# Allegro board Sense8.brd
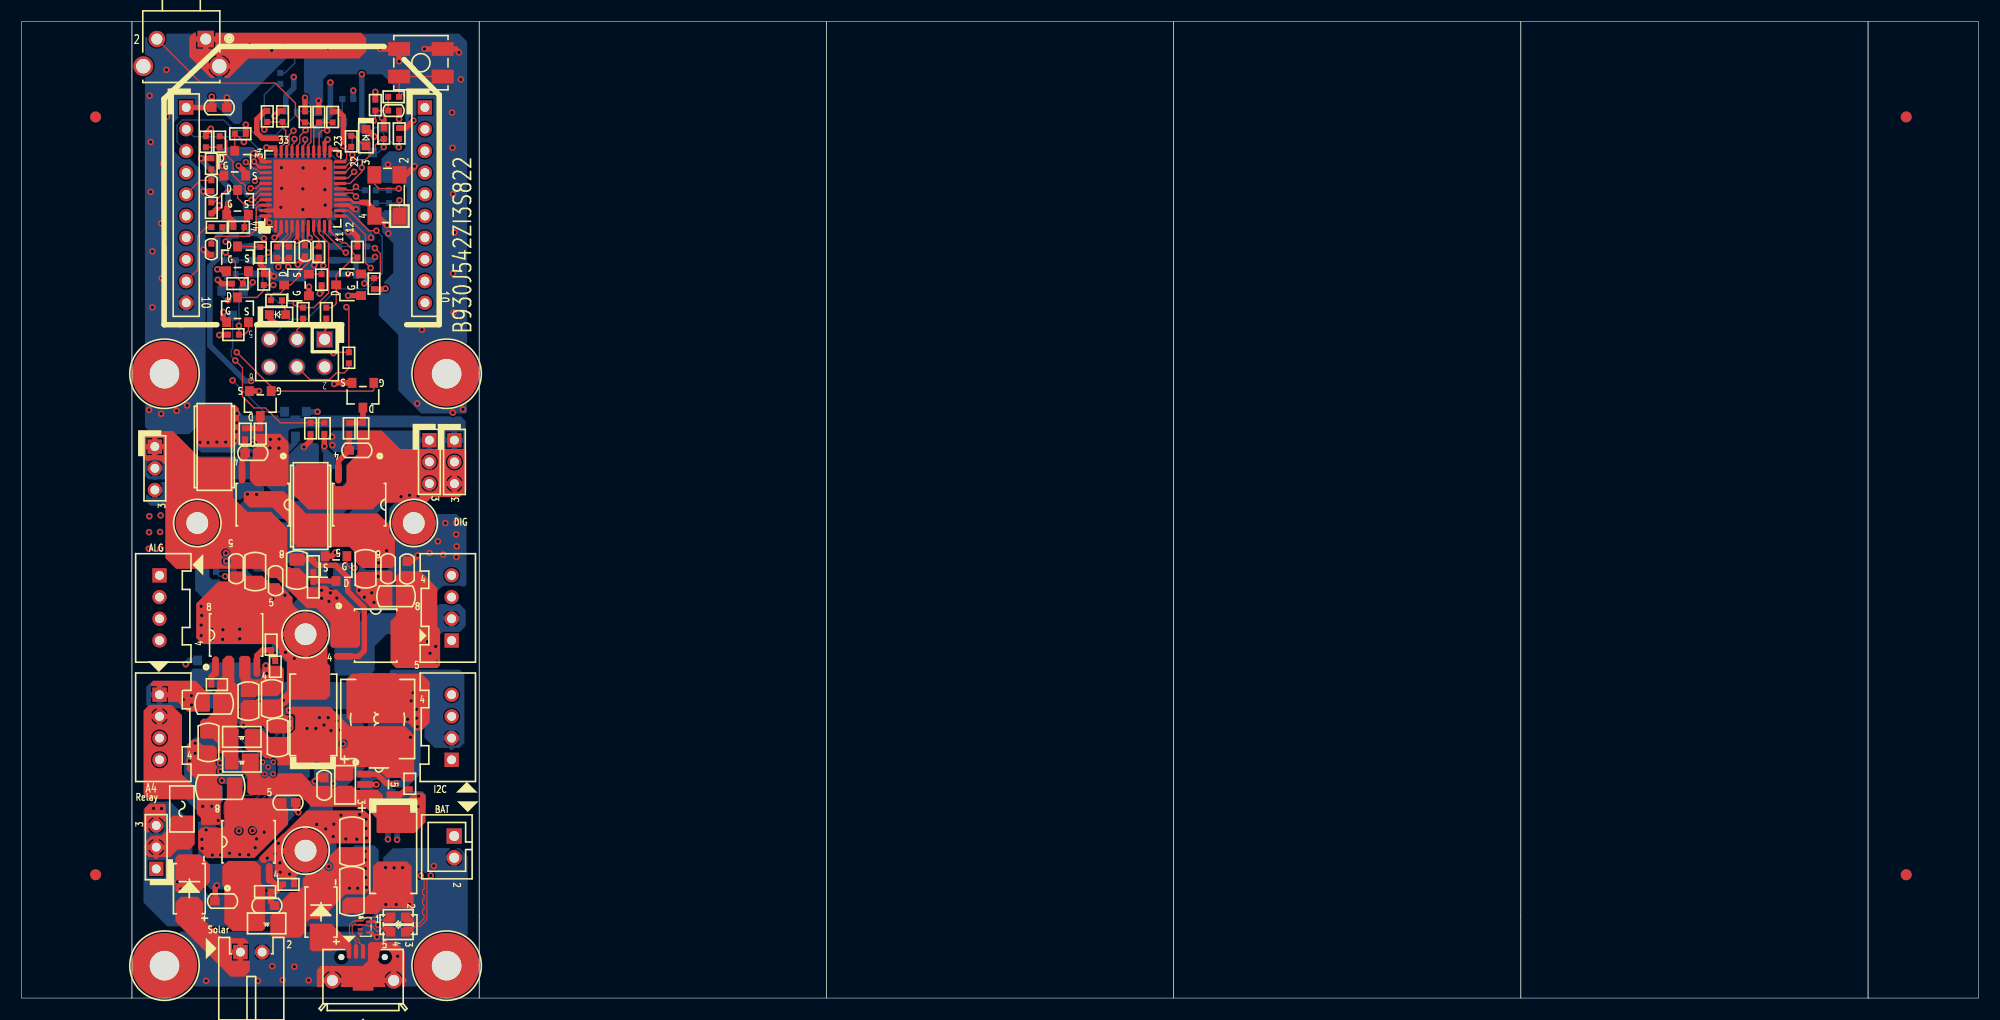
[diagram p0: board, top side]
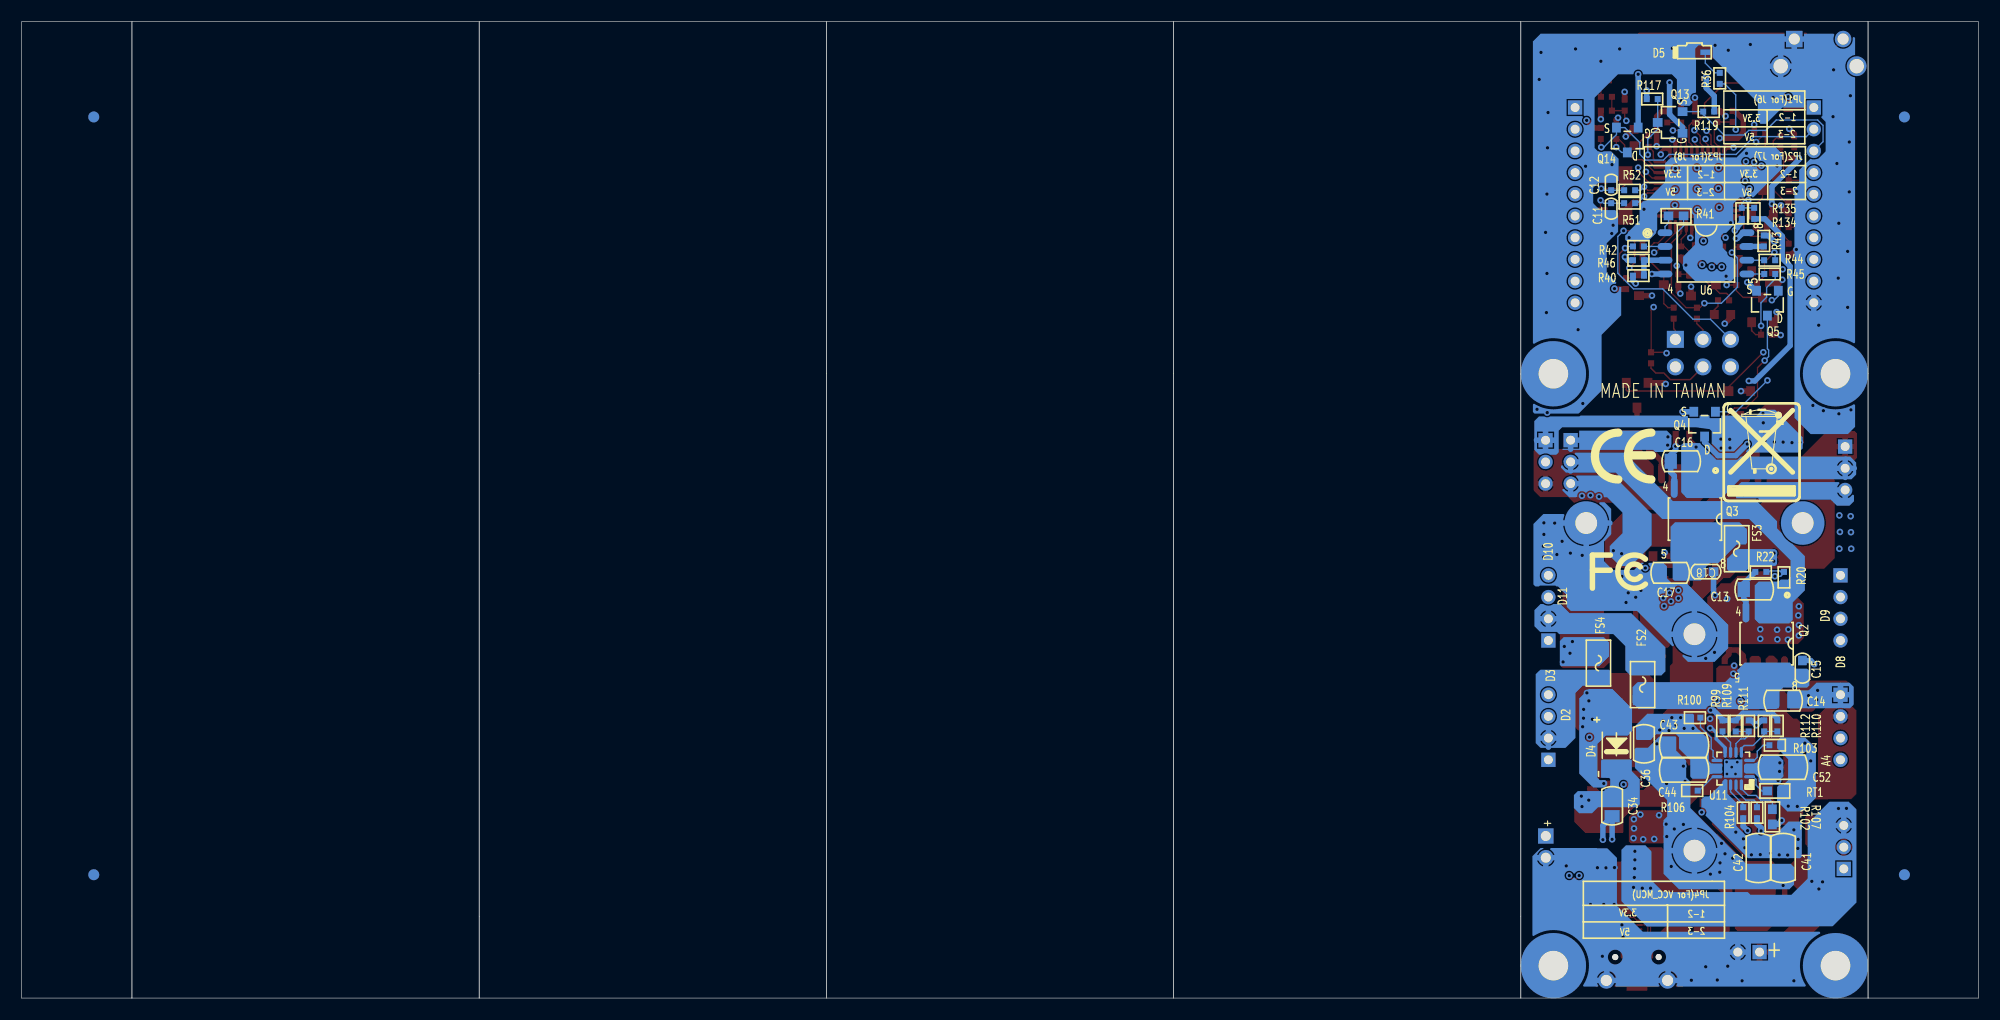
[diagram p1: board, bottom side, seen from below]

Outline 180.32 x 90 mm; copper layers: TOP, L2-GND1, L3-INT, L4-VCC, L5-GND2, BOTTOM. Coordinates in mm from the lower left corner of the outline.
Outline path: 10.16,90 0,90 0,0 10.16,0 ; 10.16,90 10.16,0 ; 10.16,90 42.16,90 ; 10.16,90 10.16,57.56 10.16,7.56 10.16,0 ; 10.16,0 42.16,0 ; 42.16,90 42.16,57.56 ; 42.16,90 74.16,90 ; 42.16,90 42.16,57.56 ; 42.16,57.56 42.16,7.56 ; 42.16,57.56 42.16,7.56 ; 74.16,90 74.16,57.56 ; 74.16,90 106.16,90 ; 74.16,90 74.16,57.56 ; 42.16,7.56 42.16,0 ; 42.16,7.56 42.16,0 ; 42.16,0 74.16,0 ; 74.16,57.56 74.16,7.56 ; 74.16,57.56 74.16,7.56 ; 106.16,90 106.16,57.56 ; 106.16,90 138.16,90 ; 106.16,90 106.16,57.56 ; 74.16,7.56 74.16,0 ; 74.16,7.56 74.16,0 ; 74.16,0 106.16,0 ; 106.16,57.56 106.16,7.56 ; 106.16,57.56 106.16,7.56 ; 138.16,90 138.16,0 ; 138.16,90 170.16,90 ; 138.16,90 138.16,57.56 138.16,7.56 138.16,0 ; 106.16,7.56 106.16,0 ; 106.16,7.56 106.16,0 ; 106.16,0 138.16,0 ; 170.16,90 170.16,0 ; 170.16,90 180.32,90 180.32,0 170.16,0 ; 170.16,90 170.16,0 ; 138.16,0 170.16,0

## Design rules (mm)
net group DIFFPAIR1: nets USB_R_D+ USB_R_D-
net group PW: nets +V5A INT_5V LX N15488481 N15503313 USB5V USB_5V VCC3_3 VCC3_3_ALG1 VCC3_3_DIG1 VCC3_3_I2C VCC_BAT W40_VCC_BAT

## Placement (name value [footprint] x y rotation side)
C1  0.1UF/50V/X7R/6  [C0603]  23.4 38.46 90 top
C2  0.1UF/50V/X7R/6  [C0603]  18.5 8.94 0 top
C3  1U/16V/X7R/6  [C0603]  22.61 8.53 180 top
C4  0.1UF/50V/X7R/6  [C0603]  24.55 18.02 180 top
C5  22u/10V/X7R/1206  [C1206]  18.3 19.44 0 top
C6  0.1U/16V/X7R/4  [C0402]  17.48 74.87 90 top
C9  0.1U/16V/X7R/4  [C0402]  17.48 69.03 90 top
C10  1U/6.3V/X5R/4  [C0402]  26.11 68.88 90 top
C11  22P/50V/NPO/4  [C0402]  33.84 72.76 90 bottom
C12  22P/50V/NPO/4  [C0402]  33.84 74.97 270 bottom
C13  10u/16V/X7R/8  [C0805]  20.65 37.66 180 bottom
C14  10u/16V/X7R/8  [C0805]  17.99 27.41 0 bottom
C15  0.1UF/50V/X7R/6  [C0603]  16.21 30.42 270 bottom
C16  10u/16V/X7R/8  [C0805]  27.38 49.48 180 bottom
C17  10u/16V/X7R/8  [C0805]  28.4 39.2 180 bottom
C18  0.1UF/50V/X7R/6  [C0603]  25.1 39.31 0 bottom
C25  1U/16V/X7R/6  [C0603]  27.88 19.63 270 top
C26  0.1U/50V/X7R/8  [C0805]  17.73 27.13 0 top
C27  10u/16V/X7R/8  [C0805]  17.21 23.56 90 top
C28  0.1U/50V/X7R/8  [C0805]  20.89 27.37 90 top
C29  10u/16V/X7R/8  [C0805]  23.05 27.58 90 top
C30  10u/16V/X7R/8  [C0805]  25.36 39.46 270 top
C31  10u/16V/X7R/8  [C0805]  34.5 37.04 0 top
C32  0.1UF/50V/X7R/6  [C0603]  35.51 39.57 270 top
C33  10U/6.3V/X5R/6  [C0603]  18.21 82.09 180 top
C34  22U/10V/X5R/8  [C0805]  33.75 17.72 90 bottom
C35  0.1U/50V/X7R/8  [C0805]  23.59 24.02 270 top
C36  22U/10V/X5R/8  [C0805]  30.81 23.44 90 bottom
C37  0.1UF/250V/X7R/1206  [C1206H75]  30.43 9.85 90 top
C38  0.1U/16V/X7R/4/X  [C0402]  34.28 81.8 180 top
C41  0.1U/100V/X7R/1206  [C1206]  17.99 12.91 90 bottom
C42  10u/25V/X7R/1206  [C1206]  20.27 12.91 90 bottom
C43  0.1U/100V/X7R/1206  [C1206]  27.12 23.31 180 bottom
C44  10u/25V/X7R/1206  [C1206]  27.12 21.02 180 bottom
C45  10u/25V/X7R/1206  [C1206]  30.43 14.43 270 top
C46  1U/16V/X7R/6  [C0603]  30.88 50.49 0 top
C47  10u/16V/X7R/8  [C0805]  31.69 39.56 90 top
C48  0.1UF/50V/X7R/6  [C0603]  33.76 39.57 90 top
C49  1U/16V/X7R/6  [C0603]  21.29 50.23 0 top
C50  10u/16V/X7R/8  [C0805]  21.53 39.31 90 top
C51  0.1UF/50V/X7R/6  [C0603]  19.76 39.56 90 top
C52  4.7U/16V/X7R/1206  [C1206]  18 21.28 0 bottom
D2  BL-HY036D-AV-TRB  [LED0603]  31.73 79.32 90 top
D3  BL-HB336A-AV-TRB  [LED0603]  23.57 63.01 180 top
D4  SL34-AL/SMA-L  [SMA-L]  33.35 23.31 270 bottom
D5  12-215/R6C-AR1S1B/3C  [LED12-215]  26.16 87.19 180 bottom
D6  D-B340A-13F  [SMA]  27.59 7.94 90 top
D7  D-B340A-13F  [SMA]  15.45 10.1 90 top
D8  RCLAMP3324T/SLP1710P4T-6L  [SLP1710P4T]  31.7 6.54 270 top
EC2  330U/6.3V  [C7343H18]  34.24 13.4 270 top
EC3  330U/6.3V  [C7343H18]  26.88 26.1 90 top
FB1  120Z/3A/0805  [L0805H36]  22.57 6.88 0 top
FB2  120Z/3A/0805/X  [L0805H36]  20.29 21.79 0 top
FB3  120Z/3A/0805  [L0805H36]  20.29 24.08 0 top
FS1  3A/32V/1206  [SF1206H53]  14.76 17.43 270 top
FS2  3A/32V/1206  [SF1206H53]  30.94 28.9 270 bottom
FS3  3A/32V/1206  [SF1206H53]  22.27 41.42 90 bottom
FS4  3A/32V/1206  [SF1206H53]  35.01 30.87 90 bottom
H1  MountingHole/no guard hole  [2_7MMHR6MM-PT]  39.16 57.55 0 top
H2  MountingHole/no guard hole  [2_7MMHR6MM-PT]  13.16 2.99 0 top
H3  MountingHole/no guard hole  [2_7MMHR6MM-PT]  13.16 57.55 0 top
H4  MountingHole/no guard hole  [2_7MMHR6MM-PT]  39.16 2.99 0 top
H5  MountingHole/no guard hole  [DCX1-C158D79]  26.16 13.59 0 top
H6  MountingHole/no guard hole  [DCX1-C158D79]  26.16 33.54 0 top
H7  MountingHole/no guard hole  [DCX1-C158D79]  16.18 43.79 0 top
H8  MountingHole/no guard hole  [DCX1-C158D79]  36.14 43.79 0 top
J1  Micro USB B Type  [MICROUSB_B]  31.46 1.63 0 top
J2  HEADER10/2mm  [D1A10-2MM-FEMALE]  15.16 82.09 270 top
J3  HEADER10/2mm  [D1A10-2MM-FEMALE]  37.16 82.09 270 top
J4  Wafer 4Px1/2.0mm  [4W-D1A4-2MM-TB-12005W00]  39.62 21.96 270 top
J6  Wafer 4Px1/2.0mm  [4W-D1A4-2MM-TB-12005W00]  39.62 32.96 270 top
J7  Wafer 4Px1/2.0mm  [4W-D1A4-2MM-TB-12005W00]  12.7 38.96 90 top
J8  Wafer 4Px1/2.0mm  [4W-D1A4-2MM-TB-12005W00]  12.7 27.96 90 top
J9  Wafer2P/2.0mm/90D  [EVER-2022-02]  20.16 4.24 180 top
J10  Wafer2P/2.0mm  [DFAN2-2MM]  39.86 14.94 270 top
J11  Header3Px2/2.54mm/X  [D2A3N]  27.92 60.72 180 top
JP1  PH3Px1/2mm  [D1A3-2MM]  37.57 51.43 270 top
JP2  PH3Px1/2mm  [D1A3-2MM]  12.27 50.84 270 top
JP3  PH3Px1/2mm  [D1A3-2MM]  12.4 11.91 90 top
JP4  PH3Px1/2mm  [D1A3-2MM]  39.88 51.42 270 top
L1  10uH/4A/X  [L-S7_3X6_8H3]  32.81 25.72 90 top
L2  22uH/2A  [L-S5X5H4]  32.79 25.72 90 top
L3  DLW21HN900SQ2  [L2012-4P]  34.72 6.77 270 top
NOREF  -  [unnamed]  6.81 81.22 0 top
NOREF#2  -  [unnamed]  6.81 11.37 0 top
NOREF#3  -  [#2]  10.75 -44.26 0 top
NOREF#4  -  [unnamed]  173.68 81.22 0 top
NOREF#5  -  [unnamed]  173.68 11.37 0 top
NOREF#6  -  [unnamed]  173.68 11.37 180 bottom
NOREF#7  -  [#2]  35.66 47.49 180 bottom
NOREF#8  -  [unnamed]  6.81 11.37 180 bottom
NOREF#9  -  [#2]  40.41 82.85 270 bottom
NOREF#10  -  [unnamed]  6.81 81.22 180 bottom
NOREF#11  -  [unnamed]  173.68 81.22 180 bottom
NOREF#12  -  [#2]  19.97 51.32 180 bottom
NOREF#13  -  [#2]  34.29 39.31 180 bottom
Q1  FDS4685/SOIC-8  [SOP8]  20.91 14.41 0 top
Q2  FDS4685/SOIC-8  [SOP8]  19.51 32.67 0 bottom
Q3  FDS4685/SOIC-8  [SOP8]  26.11 44.15 0 bottom
Q4  2N7002/SOT-23  [SOT23-GDS]  25.22 52.9 0 bottom
Q5  2N7002/SOT-23  [SOT23-GDS]  19.43 64.05 0 bottom
Q6  FDS4685/SOIC-8  [SOP8]  32.63 33.41 270 top
Q7  2N7002/SOT-23  [SOT23-GDS]  28.97 39.59 180 top
Q8  2N7002/SOT-23  [SOT23-GDS]  19.64 76.95 0 top
Q9  2N7002/SOT-23  [SOT23-GDS]  25.33 65.73 90 top
Q10  2N7002/SOT-23  [SOT23-GDS]  19.89 68.14 0 top
Q11  2N7002/SOT-23  [SOT23-GDS]  30.13 65.75 90 top
Q12  2N7002/SOT-23  [SOT23-GDS]  19.89 63.44 0 top
Q13  2N7002/SOT-23  [SOT23-GDS]  28.4 80.71 90 bottom
Q14  2N7002/SOT-23  [SOT23-GDS]  32.35 79.09 0 bottom
Q15  2N7002/SOT-23  [SOT23-GDS]  19.89 73.35 0 top
Q16  FDS4685/SOIC-8  [SOP8]  31.1 45.48 180 top
Q17  2N7002/SOT-23  [SOT23-GDS]  31.45 55.57 180 top
Q18  FDS4685/SOIC-8  [SOP8]  22.21 45.48 180 top
Q19  2N7002/SOT-23  [SOT23-GDS]  21.99 54.8 180 top
R1  10K/4  [R0402]  17.48 76.9 90 top
R2  49.9K/4/1  [R0402]  22.43 9.82 0 top
R3  10K/4/1  [R0402]  24.59 10.48 0 top
R4  10K/4/1  [R0402]  32.59 82.31 90 top
R7  10K/4/1  [R0402]  28.65 81.22 90 top
R8  10K/4/1/X  [R0402]  22.63 81.27 90 top
R10  10K/4/1/X  [R0402]  24.04 81.27 270 top
R12  10K/4/1  [R0402]  27.38 81.22 270 top
R18  330/4/1  [R0402]  30.37 78.97 90 top
R19  330/4/1  [R0402]  23.48 64.32 0 top
R20  100K/4/1  [R0402]  17.91 38.78 90 bottom
R21  100K/4/1  [R0402]  26.62 52.52 90 top
R22  10K/4/1  [R0402]  20.04 39.28 0 bottom
R23  10K/4/1  [R0402]  27.89 52.52 270 top
R28  10K/4/1  [R0402]  35.77 19.75 90 top
R29  10K/4/1  [R0402]  17.99 28.9 0 top
R30  158K/4/1  [R0402]  23.37 30.55 90 top
R31  49.9K/4/1  [R0402]  22.99 32.58 90 top
R34  0/4/1  [R0402]  17.99 71.06 180 top
R36  330/4/1  [R0402]  23.83 84.78 90 bottom
R37  10K/4/1  [R0402]  16.97 78.93 90 top
R38  0/4/1  [R0402]  18.24 78.93 90 top
R39  10K/4/1  [R0402]  26.11 81.22 90 top
R40  3.3K/4  [R0402]  31.32 66.59 180 bottom
R41  0/6  [R0603]  27.85 72.1 0 bottom
R42  47/4/1  [R0402]  31.32 69.28 180 bottom
R43  3.3K/4  [R0402]  19.76 69.79 270 bottom
R44  47/4/1  [R0402]  19.23 68.01 180 bottom
R45  47/4/1  [R0402]  19.22 66.74 180 bottom
R46  3.3K/4/X  [R0402]  31.32 68.01 0 bottom
R48  100K/4/1  [R0402]  26.87 37.86 90 top
R49  10K/4/1  [R0402]  26.88 39.8 90 top
R51  0/4/1  [R0402]  32.13 73.27 180 bottom
R52  0/4/1  [R0402]  32.13 74.46 180 bottom
R70  1K/4/1  [R0402]  20.14 79.67 0 top
R71  0/6/X  [R0603]  34.7 7.48 0 top
R72  0/6/X  [R0603]  34.7 6.06 0 top
R73  22/4/1  [R0402]  24.64 68.75 90 top
R74  22/4/1  [R0402]  23.52 68.75 90 top
R75  47/4/1  [R0402]  28.07 63.14 270 top
R76  47/4/1  [R0402]  25.94 63.14 270 top
R77  47/4/1  [R0402]  30.15 59.02 90 top
R80  10K/4/1  [R0402]  19.51 61.15 0 top
R81  10K/4/1  [R0402]  32.46 65.85 90 top
R82  10K/4/1  [R0402]  27.64 66.22 90 top
R83  10K/4/1  [R0402]  19.89 65.85 0 top
R84  0/8/X  [R0805]  29.8 19.66 270 top
R88  510/4/1  [R0402]  34.28 83.07 180 top
R99  1.5K/4/1  [R0402]  23.57 25.09 270 bottom
R100  1.5K/4/1  [R0402]  26.11 25.85 180 bottom
R102  1K/4/1  [R0402]  20.4 17.09 270 bottom
R103  10K/4/1  [R0402]  18.75 23.31 0 bottom
R104  47K/4/1  [R0402]  21.67 17.09 270 bottom
R106  1.1K/4/1  [R0402]  26.37 19.12 0 bottom
R107  1.13K/6/1  [R0603]  18.98 16.7 270 bottom
R109  10K/4/1/X  [R0402]  22.35 25.09 90 bottom
R110  10K/4/1  [R0402]  18.52 25.09 90 bottom
R111  10K/4/1  [R0402]  21.16 25.09 270 bottom
R112  10K/4/1/X  [R0402]  19.74 25.09 270 bottom
R116  10K/4/1  [R0402]  33.37 79.69 270 top
R117  10K/4/1  [R0402]  30.05 82.87 180 bottom
R118  10K/4/1  [R0402]  34.79 79.7 270 top
R119  10K/4/1  [R0402]  24.84 81.71 0 bottom
R120  10K/4/1  [R0402]  17.48 72.84 90 top
R121  10K/4/1  [R0402]  20.02 71.06 0 top
R122  10K/4/1  [R0402]  22.3 66.23 90 top
R123  10K/4/1  [R0402]  30.94 68.77 90 top
R124  10K/4/1  [R0402]  22 68.72 270 top
R125  10K/4/1  [R0402]  27.38 68.77 270 top
R126  0.002/2512/1/X  [R2512]  26.62 45.36 270 top
R127  0/2010/X  [R2010]  26.62 45.35 270 top
R128  100K/4/1  [R0402]  31.45 52.52 90 top
R129  10K/4/1  [R0402]  30.18 52.52 270 top
R130  0.002/2512/1/X  [R2512]  17.75 50.8 270 top
R131  0/2010/X  [R2010]  17.75 50.8 270 top
R132  100K/4/1  [R0402]  21.99 52.01 90 top
R133  10K/4/1  [R0402]  20.59 52.01 270 top
R134  10K/4/1  [R0402]  20.65 72.33 270 bottom
R135  10K/4/1  [R0402]  21.8 72.33 90 bottom
RT1  10K/6/1/TH  [R0603]  18.75 19.09 0 bottom
SW1  Switch/DIP/90Deg.  [SW-DIP-RA-TACT2-L5_85]  16.96 88.4 0 top
SW2  TACT SWITCH  [SW-SMD-TACT-7914J-H3_43]  36.79 86.22 270 top
U1  ATmega32U4/QFN-44  [QFN44-TH-ATMEGA32U4]  25.91 74.59 90 top
U5  RT9183/SOP-8  [SOP8]  19.76 33.47 0 top
U6  SPI Flash 64M-Bit/SOIC-8/X  [SOP8L]  25.1 68.65 270 bottom
U8  SP6641B/SOT23-5  [SOT23-5]  32.93 19.69 270 top
U11  BQ24073/QFN-16  [QFN16-TH-BQ24073]  22.58 21.15 0 bottom
X1  8MHz/30ppm  [SY-AGX-5032]  33.66 73.98 90 top

## Library data of the parts
C1-C6 C9-C18 C25-C38 C41-C52 = C
D2 D3 D5 = LED
D4 D6 D7 = DIODE_SCHOTTKY
D8 = ESD_RClamp3324T
EC2 EC3 = EC
FB1-FB3 = FERRITE_BEAD
FS1-FS4 = FUSE
H1-H8 = MH1
J1 = MicroUSB_B Type
J2 J3 = HEADER10
J4 J6-J8 = 4WAFER4P
J9 = 1WAFER2P
J10 = 4WAFER2P
J11 = HEADER3X2
JP1-JP4 = HEADER3
L1 L2 = INDUCTOR_1
L3 = COMMOM_MODE_CHOCK_X1
Q1-Q3 Q6 Q16 Q18 = PMOS_SO8_0
Q4 Q5 Q7-Q15 Q17 Q19 = NMOS
R1-R4 R7 R8 R10 R12 R18-R23 R28-R31 R34 R36-R46 R48 R49 R51 R52 R70-R77 R80-R84 R88 R99 R100 R102-R104 R106 R107 R109-R112 R116-R135 = R
RT1 = RT
SW1 = BTN4P2C
SW2 = sw-tactx1
U1 = IC_ATmega32U4
U5 = IC_RT9183
U6 = IC_W25Q64BVSSIG
U8 = IC_SP6641B
U11 = IC_bq24073
X1 = XTAL4P_13

## Footprints (pads in the part's own frame, mm; a bottom-side part is the same pattern mirrored in y, then rotated)
2_7MMHR6MM-PT
  round 6.02 hole 2.718: 1(0,0)
4W-D1A4-2MM-TB-12005W00
  rect 1.321x1.321 hole 0.813: 1(0,0)
  round 1.321 hole 0.813: 2(-2,0) 3(-4,0) 4(-6,0)
C0402
  rect 0.559x0.559 smd: 1(-0.508,0) 2(0.508,0)
C0603
  rect 0.889x0.813 smd: 1(-0.699,0) 2(0.699,0)
C0805
  rect 1.143x1.397 smd: 1(-0.965,0) 2(0.965,0)
C1206
  rect 1.27x1.575 smd: 1(-1.397,0) 2(1.397,0)
C1206H75
  rect 1.27x1.575 smd: 1(-1.397,0) 2(1.397,0)
C7343H18
  rect 2.413x2.921 smd: 1(-3.061,0) 2(3.061,0)
D1A3-2MM
  rect 1.321x1.321 hole 0.813: 1(0,0)
  round 1.321 hole 0.813: 2(2,0) 3(4,0)
D1A10-2MM-FEMALE
  rect 1.321x1.321 hole 0.813: 1(0,0)
  round 1.321 hole 0.813: 2(2,0) 3(4,0) 4(6,0) 5(8,0) 6(10,0) 7(12,0) 8(14,0) 9(16,0) 10(18,0)
D2A3N
  rect 1.372x1.372 hole 1.016: 1(0,0)
  round 1.372 hole 1.016: 2(0,2.54) 3(2.54,0) 4(2.54,2.54) 5(5.08,0) 6(5.08,2.54)
DCX1-C158D79
  round 4.013 hole 2.007: 1(0,0)
DFAN2-2MM
  rect 1.422x1.422 hole 0.914: 1(0,0)
  round 1.422 hole 0.914: 2(2,0)
EVER-2022-02
  rect 1.321x1.321 hole 0.813: 1(0,0)
  round 1.321 hole 0.813: 2(-2,0)
L0805H36
  rect 1.143x1.397 smd: 1(-0.965,0) 2(0.965,0)
L2012-4P
  oval 0.508x1.016 smd: 1(-0.425,-0.9) 2(-0.425,0.9) 3(0.425,0.9) 4(0.425,-0.9)
L-S5X5H4
  rect 1.803x5.207 smd: 1(-1.6,0) 2(1.6,0)
L-S7_3X6_8H3
  rect 2.388x3.429 smd: 1(-3.042,0) 2(3.042,0)
LED12-215
  rect 0.914x0.508 smd: A(1,0) C(-1,0)
LED0603
  rect 0.813x0.813 smd: A(-0.756,0) C(0.756,0)
MICROUSB_B
  round 0.559 hole 0.559 unplated: (-2,2.15) (2,2.15)
  oval 0.406x1.372 smd: 1(-1.3,2.67) 2(-0.65,2.67) 3(0,2.67) 4(0.65,2.67) 5(1.3,2.67)
  round 1.524 hole 1.016: CG1(-2.825,0) CG2(2.825,0)
  rect 1.905x1.905 smd: CG3(0,0)
QFN16-TH-BQ24073
  oval 1.016x0.305 smd: 1(-1.5,0.75) 2(-1.5,0.25) 3(-1.5,-0.25) 4(-1.5,-0.75) 9(1.5,-0.75) 10(1.5,-0.25) 11(1.5,0.25) 12(1.5,0.75)
  oval 0.305x1.016 smd: 5(-0.75,-1.5) 6(-0.25,-1.5) 7(0.25,-1.5) 8(0.75,-1.5) 13(0.75,1.5) 14(0.25,1.5) 15(-0.25,1.5) 16(-0.75,1.5)
  rect 1.702x1.702 smd: 17(0,0)
QFN44-TH-ATMEGA32U4
  oval 1.194x0.305 smd: 1(-3.44,2.5) 2(-3.44,2) 3(-3.44,1.5) 4(-3.44,1) 5(-3.44,0.5) 6(-3.44,0) 7(-3.44,-0.5) 8(-3.44,-1) 9(-3.44,-1.5) 10(-3.44,-2) 11(-3.44,-2.5) 23(3.44,-2.5) 24(3.44,-2) 25(3.44,-1.5) 26(3.44,-1) 27(3.44,-0.5) 28(3.44,0) 29(3.44,0.5) 30(3.44,1) 31(3.44,1.5) 32(3.44,2) 33(3.44,2.5)
  oval 0.305x1.194 smd: 12(-2.5,-3.44) 13(-2,-3.44) 14(-1.5,-3.44) 15(-1,-3.44) 16(-0.5,-3.44) 17(0,-3.44) 18(0.5,-3.44) 19(1,-3.44) 20(1.5,-3.44) 21(2,-3.44) 22(2.5,-3.44) 34(2.5,3.44) 35(2,3.44) 36(1.5,3.44) 37(1,3.44) 38(0.5,3.44) 39(0,3.44) 40(-0.5,3.44) 41(-1,3.44) 42(-1.5,3.44) 43(-2,3.44) 44(-2.5,3.44)
  rect 5.41x5.41 smd: 45(0,0)
R0402
  rect 0.559x0.559 smd: 1(-0.508,0) 2(0.508,0)
R0603
  rect 0.889x0.813 smd: 1(-0.699,0) 2(0.699,0)
R0805
  rect 1.143x1.397 smd: 1(-0.965,0) 2(0.965,0)
R2010
  rect 2.007x2.515 smd: 1(-2.75,0) 2(2.75,0)
R2512
  rect 2.515x3.023 smd: 1(-2.25,0) 2(2.25,0)
SF1206H53
  rect 1.016x1.803 smd: 1(-1.4,0) 2(1.4,0)
SLP1710P4T
  oval 0.203x0.508 smd: 1(-0.6,-0.5) 2(-0.2,-0.5) 3(0.2,-0.5) 4(0.6,-0.5)
  oval 0.203x0.762 smd: 5(0.5,0.38) 6(-0.5,0.38)
SMA
  rect 2.007x2.007 smd: A(-2.108,0) C(2.108,0)
SMA-L
  rect 1.6x2.794 smd: A(-2.2,0) C(2.2,0)
SOP8
  oval 0.635x1.905 smd: 1(-1.905,-2.91) 2(-0.635,-2.91) 3(0.635,-2.91) 4(1.905,-2.91) 5(1.905,2.91) 6(0.635,2.91) 7(-0.635,2.91) 8(-1.905,2.91)
SOP8L
  oval 0.635x1.372 smd: 1(-1.905,-3.775) 2(-0.635,-3.775) 3(0.635,-3.775) 4(1.905,-3.775) 5(1.905,3.775) 6(0.635,3.775) 7(-0.635,3.775) 8(-1.905,3.775)
SOT23-5
  rect 0.635x1.321 smd: 1(-0.95,-1.35) 2(0,-1.35) 3(0.95,-1.35) 4(0.95,1.35) 5(-0.95,1.35)
SOT23-GDS
  rect 0.813x0.914 smd: D(0,1.145) G(-1,-1.145) S(1,-1.145)
SW-DIP-RA-TACT2-L5_85
  rect 1.524x1.524 hole 1.016: 1(0,0)
  round 1.524 hole 1.016: 2(-4.5,0)
  round 1.829 hole 1.321: CG1(1.25,-2.5) CG2(-5.75,-2.5)
SW-SMD-TACT-7914J-H3_43
  rect 1.27x2.032 smd: 1(-1.27,-2.005) 2(-1.27,2.005) 3(1.27,-2.005) 4(1.27,2.005)
SY-AGX-5032
  rect 1.6x1.295 smd: 1(-1.9,-1.15) 2(1.9,-1.15) 3(1.9,1.15) 4(-1.9,1.15)
unnamed
  round 1.016 smd: 1(0,0)

## Nets
+V5A: C4.2 C5.2 C41.2 C42.2 Q1.5(D4) Q1.6(D3) Q1.7(D2) Q1.8(D1) R8.2 U1.2(UVCC) U1.7(VBUS) U11.13(IN)
GND: C1.1 C2.1 C4.1 C5.1 C6.1 C9.1 C10.1 C11.1 C12.1 C14.1 C15.1 C17.1 C18.1 C25.1 C26.1 C27.1 C28.1 C29.1 C31.1 C32.1 C33.1 C34.1 C35.1 C36.1 C37.1 C38.1 C41.1 C42.1 C43.1 C44.1 C45.1 C47.1 C48.1 C50.1 C51.1 C52.1 D2.C(CATHODE) D3.C(CATHODE) D5.C(CATHODE) D8.5(GND1) D8.6(GND2) EC2.2 EC3.2 H1.1 H2.1 H3.1 H4.1 H5.1 H6.1 H7.1 H8.1 J1.4(ID) J1.5(GND) J1.CG1 J1.CG2 J1.CG3 J2.10 J4.1 J6.1 J7.1 J8.1 J9.2(-) J10.2 J11.6 Q4.S Q5.S Q7.S Q8.S Q17.S Q19.S R3.2 R10.1 R12.1 R31.2 R46.2 R102.2 R103.1 R104.2 R106.2 R107.2 R111.1 R112.1 R135.1 RT1.1 SW1.1 SW1.CG1 SW1.CG2 SW2.1 SW2.2 U1.5(UGND) U1.15(GND-1) U1.23(GND-2) U1.33(PE2/HWB#) U1.35(GND-3) U1.43(GND-4) U1.45(TH-PAD) U5.5(GND1) U5.6(GND2) U5.7(GND3) U5.8(GND4) U6.4(GND) U8.2(GND) U11.8(VSS) U11.17(THERMAL PAD) X1.2 X1.4
VBATT_LVL: R7.1 R12.2 U1.26(PD6(ADC9))
VCC3_3: C28.2 C29.2 C49.2 J11.2 JP4.1 Q9.G Q10.G Q11.G Q12.G Q18.1(S1) Q18.2(S2) Q18.3(S3) R30.1 R40.1 R43.1 R80.1 R81.1 R82.1 R83.1 R130.1 R131.1 R132.1 U5.3(VOUT) U6.8(VCC)
VCC3_3_ALG1: C17.2 C18.2 FS3.2 Q3.5(D4) Q3.6(D3) Q3.7(D2) Q3.8(D1)
VCC3_3_DIG1: C14.2 C15.2 FS2.2 Q2.5(D4) Q2.6(D3) Q2.7(D2) Q2.8(D1)
VCC3_3_I2C: C31.2 C32.2 FS4.2 Q6.5(D4) Q6.6(D3) Q6.7(D2) Q6.8(D1)
VCC4_4: C35.2 C36.2 C43.2 C44.2 EC3.1 FB3.2 L1.1 L2.1 R7.2 R28.2 R84.1 R99.1 R100.1 R109.2 R110.2 U8.5(VBATT) U11.10(OUT1) U11.11(OUT2)
VCC_BAT: C52.2 J10.1 R134.2 U11.2(BAT1) U11.3(BAT2)
VCC_MCU: JP4.2 R4.2 R37.2 R39.2 R70.2 R116.1 R117.1 R120.1 R122.2 R123.2 R124.2 R125.2 U1.14(VCC-1) U1.24(AVCC-1) U1.34(VCC-2) U1.44(AVCC-2)
A0: Q4.G U1.36(PF7(ADC7))
A1: Q17.G Q19.G U1.37(PF6(ADC6))
A2: R36.1 U1.38(PF5(ADC5))
A3: R38.2 U1.39(PF4(ADC4))
A5: Q15.S R34.1 R121.2
A5_R: Q15.D R120.2 U1.41(PF0(ADC0))
BAT: R134.1 R135.2 U1.40(PF1(ADC1))
CHARGE_STAT: R8.1 R10.2 U1.32(PC7)
CON_3V: C1.2 C30.2 C33.2 C50.2 C51.2 J2.1 JP1.1 JP2.1 JP3.1 Q6.1(S1) Q6.2(S2) Q6.3(S3) Q13.G Q14.G Q15.G Q18.5(D4) Q18.6(D3) Q18.7(D2) Q18.8(D1) R1.2 R48.1 R118.1 R119.1 R121.1 R130.2 R131.2
CON_5V: C47.2 C48.2 JP1.3 JP2.3 Q16.5(D4) Q16.6(D3) Q16.7(D2) Q16.8(D1) R126.2 R127.2
D2_I2C: J4.3 U1.19(PD1(SDA))
D3: J4.4 U1.18(PD0(SCL))
D4: Q5.G U1.25(PD4(ADC8))
D5: Q7.G U1.31(PC6)
D6: R39.1 SW1.2 U1.27(PD7(ADC10))
D8: J7.4 U1.28(PB4(ADC11))
D9: J7.3 U1.29(PB5(ADC12))
D10: J6.4 U1.30(PB6(ADC13))
D11: J6.3 U1.12(PB7)
EN1: R109.1 R111.2 U11.6(EN1)
EN2: R110.1 R112.2 U11.5(EN2)
GPIO_RY: Q8.G R37.1 R38.1
GPIO_RY_MCU: J8.4 Q8.D R70.1
INT_5V: C25.2 C34.2 C46.2 D4.C EC2.1 FB2.2 JP4.3 Q16.1(S1) Q16.2(S2) Q16.3(S3) R84.2 R126.1 R127.1 R128.1 U8.3(VOUT)
LX: D4.A L1.2 L2.2 U8.1(LX)
MISO: Q11.D R75.1 R123.1 U1.11(PB3(MISO))
MISO_MOS: Q11.S R42.1 R81.2
MOSI: Q12.D R77.2 R122.1 U1.10(PB2(MOSI))
MOSI_MOS: Q12.S R45.2 R80.2
RESET: C38.2 J11.5 R4.1 R88.2 U1.13(RESET#)
RESET#: C6.2 J2.5 R1.1
RXI: J2.2 Q14.S R118.2
RXI_R: Q14.D R116.2 U1.20(PD2(RX))
SCK: Q10.D R76.1 R124.1 U1.9(PB1(SCK))
SCK_MOS: Q10.S R44.2 R83.2
SPI1_WP#: R40.2 R46.1 U6.3(WP#)
SS: Q9.D R19.1 R125.1 U1.8(PB0(SS))
SS_MOS: Q9.S R41.1 R82.2
TXO: Q13.D R117.2 U1.21(PD3(TX))
TXO_R: J2.3 Q13.S R119.2
USB5V: C2.2 C3.2 FB1.1 Q1.1(S1) Q1.2(S2) Q1.3(S3) R2.1
USB_5V: C37.2 C45.2 D6.C D7.C FB1.2 JP3.3
USB_D+: L3.3 R72.2 R73.1
USB_D-: L3.2 R71.2 R74.1
USB_L_D+: D8.2(I/O 2) J1.3(D+) L3.4 R72.1
USB_L_D-: D8.1(I/O 1) J1.2(D-) L3.1 R71.1
USB_R_D+: R73.2 U1.4(D+)
USB_R_D-: R74.2 U1.3(D-)
W40_VCC_BAT: C26.2 C27.2 FB2.1 FB3.1 R29.2 U5.2(VIN)
XTAL1: R52.2 U1.17(XTAL1)
XTAL2: R51.2 U1.16(XTAL2)
N15412895: C3.1 Q1.4(G) R2.2 R3.1
N15421610: C11.2 R51.1 X1.1
N15479014: D3.A(ANODE) R19.2
N15479046: D2.A(ANODE) R18.2
N15479600: R18.1 U1.22(PD5)
N15488481: C13.2 JP1.2 Q2.1(S1) Q2.2(S2) Q2.3(S3) R20.1
N15488587: Q4.D R20.2 R22.1
N15488669: C13.1 Q2.4(G) R22.2
N15503313: C16.2 JP2.2 Q3.1(S1) Q3.2(S2) Q3.3(S3) R21.1
N15503395: Q5.D R21.2 R23.1
N15503453: C16.1 Q3.4(G) R23.2
N15616877: R28.1 U8.4(SHDN)
N15678706: R30.2 R31.1 U5.4(ADJ)
N15678710: R29.1 U5.1(EN)
N15949416: D5.A(ANODE) R36.2
N15953991: Q7.D R48.2 R49.1
N15954045: C30.1 Q6.4(G) R49.2
N15970604: R88.1 SW2.3 SW2.4
N16069358: C12.2 R52.1 X1.3
N16262459: D6.A J1.1(VBUS)
N16332828: R41.2 U6.1(CS#)
N16332840: R42.2 U6.2(DO)
N16332886: R44.1 U6.6(CLK)
N16332890: R45.1 U6.5(DI)
N16332894: R43.2 U6.7(HOLD#)
N16392209: D7.A J9.1(+)
N16520017: C9.2 U1.42(AREF)
N16521339: C10.2 U1.6(UCAP)
N17224486: R104.1 U11.14(TMR)
N17229179: R106.1 U11.12(ILIM)
N17232070: R107.1 U11.16(ISET)
N17245016: R102.1 U11.15(TD)
N17250507: R103.2 U11.4(\\\\CE)
N17255097: RT1.2 U11.1(TS)
N17284429: R99.2 U11.7(\\\\\\\\\\PGOOD)
N17293450: R100.2 U11.9(\\\\\\CHG)
N17391070: J11.1 R75.2
N17391701: J11.3 R76.2
N17393508: J11.4 R77.1
N17696371: FS3.1 J7.2
N17706028: FS2.1 J6.2
N17729529: FS4.1 J4.2
N17744633: FS1.2 JP3.2
N17744655: FS1.1 J8.2
N18131103: Q17.D R128.2 R129.1
N18131122: C46.1 Q16.4(G) R129.2
N18141519: Q19.D R132.2 R133.1
N18141550: C49.1 Q18.4(G) R133.2
N18306152: J2.9 R34.2

Pads without a net: D8 3 4; J2 4 6 7 8; J3 1 2 3 4 5 6 7 8 9 10; J8 3; NOREF 1; NOREF#2 1; NOREF#4 1; NOREF#5 1; NOREF#6 1; NOREF#8 1; NOREF#10 1; NOREF#11 1; U1 1

## Via types
v1: diameter 0.61, hole 0.305, TOP to BOTTOM, 332 vias
v2: diameter 0.508, hole 0.254, TOP to BOTTOM, 5 vias

## Routing (per net, layer and track width the routed paths; a pad name or vN(x,y) marks a point on that pad's centre or on a via; arc(x,y) is an arc through that point)
+V5A: length 7.4
  TOP w0.305: v1(26.55,70.08) 26.41,70.21 U1.7 ; v1(23.29,70.09) 23.41,70.09 23.91,70.6 U1.2
  TOP w0.508: v1(23.84,79.26) 22.17,79.26 21.67,79.77 21.67,81 22.45,81.78 R8.2
  vias: v1(16.6,14.63) v1(16.63,13.8) v1(17,15.5) v1(17.57,13.18) v1(18.35,13.2) v1(19.15,13.35) v1(20.09,13.22) v1(20.91,13.21) v1(21.52,13.86) v1(21.64,14.67) v1(22.35,15.3)
GND: length 171.1
  TOP w0.254: v1(32.74,5.63) 32.62,5.63 32.2,6.04 D8.5 ; U1.35 21.9,76.59 21.41,77.08 v1(21.41,77.11) ; v1(32.84,6.75) 32.55,7.04 D8.6 ; 31.32,73.35 31.31,73.34 30.57,73.34 30.31,73.59 U1.15
  TOP w0.305: v1(29.26,77.77) 29.26,77.99 29.01,78.25 28.63,78.25 U1.23
  TOP w0.356: U1.5 25.41,70.04 25.33,69.96 v1(25.33,69.79)
  TOP w0.381: v1(25.91,74.59) 23.91,72.59 U1.43 ; v1(22.56,78.4) 23.14,78.4 23.41,78.13 U1.33
  TOP w0.508: U8.2 v1(32.69,19.69) ; v1(25.45,67.61) 26.11,68.27 C10.1 ; v1(27.03,19.98) 27.5,20.45 27.76,20.45 C25.1 ; SW1.1 17.9,88.4 ; SW1.1 16.02,88.4 ; SW1.1 16.96,87.46 ; C4.1 25.25,17.37 v1(25.49,17.13) ; 26.16,15.77 H5.1 23.98,13.59 ; v1(32.49,79.42) 31.84,80.07 D2.C ; SW1.CG1 19.3,85.9 ; SW1.CG1 17.12,85.9 ; SW1.CG1 18.21,86.99 ; 33.34,1.63 J1.CG2 ; J1.CG2 34.28,2.57 ; J1.CG2 35.23,1.63 ; 23.98,33.54 H6.1 26.16,31.35 ; X1.2 35.41,75.88 v1(36.2,76.67) ; J1.CG1 29.58,1.63 ; J1.CG1 27.69,1.63 ; J1.CG1 28.63,2.57 ; Q7.S 28.58,40.73 v1(28.91,41.06) ; Q17.S 28.91,56.71 v1(28.81,56.61) ; v1(33.66,71.24) 32.81,72.08 X1.4 32.51,72.64 31.8,73.35 31.32,73.35 ; C38.1 v1(34.78,81.02) ; C2.1 17.83,8.97 17.83,10.23 v1(17.99,10.38) ; Q8.S 20.64,76.08 v1(19.99,76.72) ; v1(27.36,82.72) 27.38,82.69 R12.1 ; v1(33.05,87.49) SW2.1 v1(34.78,86.35) ; C1.1 23.4,37.05 v1(23.14,36.8) ; v1(21.87,55.95) Q19.S ; R3.2 25.1,11.01 v1(24.69,11.42) ; C9.1 17.25,68.52 v1(16.77,69) ; 12.7,28.8 J8.1 13.54,27.96 ; v1(23.37,62.17) 22.82,62.72 D3.C ; R10.1 23.78,81.78 v1(23.29,81.3) ; v1(37.12,87.49) SW2.2 39.98,87.49 v1(40.3,87.17) ; C6.1 v1(16.74,74.36) ; v1(36.5,40.81) 35.96,40.26 C32.1 ; C33.1 v1(18.91,83.01)
  L3-INT w0.508: SW1.1 17.9,88.4 ; SW1.1 16.96,87.46 ; SW1.1 16.02,88.4 ; 18.21,84.81 SW1.CG1 ; SW1.CG1 19.3,85.9 ; SW1.CG1 17.12,85.9 ; SW1.CG1 18.21,86.99 ; 23.98,13.59 H5.1 ; H5.1 26.16,15.77 ; H5.1 28.34,13.59 ; H5.1 26.16,11.4 ; H7.1 16.18,45.97 ; H7.1 14,43.79 ; H7.1 16.18,41.6 ; 15.16,63.25 J2.10 ; J2.10 15.16,64.93 ; J2.10 14.32,64.09 ; 13.16,60.74 H3.1 13.16,54.36
  BOTTOM w0.305: v1(24.72,24.88) 24.56,24.88 24.16,24.48 24.16,23.89 23.33,23.07 U11.8
  BOTTOM w0.508: SW1.CG1 18.21,86.99 ; SW1.CG1 17.12,85.9 ; SW1.CG1 19.3,85.9 ; SW1.CG1 18.21,84.81 ; J9.2 23,4.24 ; J9.2 21.32,4.24 ; J9.2 22.16,3.4 ; J9.2 22.16,5.08 ; v1(24.26,37.13) 24.4,37.26 C18.1 ; 15.16,63.25 J2.10 ; J2.10 14.32,64.09 ; J2.10 15.16,64.93 ; J2.10 16,64.09 ; 34.23,1.63 J1.CG2 35.18,1.63 ; 34.23,1.63 33.29,1.63 ; 34.23,1.63 34.23,2.57 ; 36.14,41.6 H8.1 ; H8.1 38.32,43.79 ; H8.1 33.95,43.79 ; 26.16,31.35 H6.1 ; H6.1 23.98,33.54 ; H6.1 28.34,33.54 ; H6.1 26.16,35.72 ; R135.1 21.8,71.52 22.2,71.11 22.2,71.03 22.44,70.79 v1(22.44,70.76) ; R112.1 20.02,25.59 20.45,25.17 v1(20.45,25.14) 20.9,25.59 R111.1 ; R104.2 21.67,15.84 v1(21.26,15.43) ; 16.02,88.4 SW1.1 ; SW1.1 16.96,87.46 ; SW1.1 17.9,88.4 ; v1(30.08,66.74) U6.4 ; 29.53,1.63 J1.CG1 28.58,1.63 ; J8.1 13.54,27.96 ; J8.1 11.86,27.96 ; J8.1 12.7,28.8 ; J8.1 12.7,27.12 ; v1(15.12,30.78) 15.46,31.12 C15.1 ; H5.1 26.16,15.77 ; H5.1 23.98,13.59 ; H5.1 26.16,11.4 ; H5.1 28.34,13.59 ; v1(32.57,68.32) 32.57,68.27 32.31,68.01 R46.2 ; v1(21.29,65.98) 20.5,65.19 Q5.S ; v1(33.75,14.63) C34.1 34.6,15.9 v1(34.6,14.6) ; 27.64,1.63 28.58,1.63 ; 28.58,1.63 28.58,2.57 ; R107.2 18.48,16.01 v1(18.11,16.37) ; 38.97,12.94 J10.2 ; J10.2 40.75,12.94 ; J10.2 39.86,12.05 ; Q4.S v1(27.26,54.04) ; v1(20.02,15.41) 20.02,15.69 20.4,16.07 R102.2
  vias: v1(11.79,83.18) v1(11.74,54.22) v1(11.76,44.42) v1(11.74,42.94) v1(11.71,41.42) v1(11.89,78.91) v1(11.89,74.31) v1(12.04,68.82) v1(12.04,63.67) v1(12.8,44.49) v1(12.75,42.97) v1(12.8,41.42) v1(12.86,71.42) v1(12.91,66.36) v1(12.85,53.86) v1(13.03,76.93) v1(13.34,85.56) v1(13.39,81.25) v1(14.28,54.14) v1(14.71,62.02) v1(14.81,28.36) v1(14.89,27.5) v1(15.24,54.63) v1(15.45,21.86) v1(15.65,27.88) v1(15.65,27.02) v1(15.98,23.5) v1(15.98,22.56) v1(16.54,36.11) v1(16.59,35.27) v1(16.54,34.38) v1(16.54,33.42) v1(16.68,17.67) v1(17,1.59) v1(17.5,33.98) v1(17.55,33.04) v1(17.52,17.69) v1(18.54,33.95) v1(18.52,33.06) v1(20.09,34) v1(20.09,33.11) v1(21.01,87.9) v1(21.77,1.59) v1(21.92,27.37) v1(22.63,12.89) v1(23.04,87.37) v1(23.09,2.94) v1(23.35,13.3) v1(23.66,14.26) v1(23.8,12.46) v1(23.88,72.89) v1(23.83,11.6) v1(23.93,76.55) v1(23.95,74.64) v1(24.11,27.45) v1(24.06,1.67) v1(24.26,87.82) v1(24.31,31.87) v1(24.72,25.75) v1(25.12,31.31) v1(25.12,2.89) v1(25.94,76.52) v1(25.91,72.69) v1(26.44,1.64) v1(27.18,21.38) v1(27.18,16.01) v1(27.92,76.47) v1(27.94,74.51) v1(27.97,73.09) v1(28.02,15.59) v1(28.2,87.54) v1(28.3,12.13) v1(28.73,19.78) v1(28.77,16.03) v1(28.71,14.89) v1(29.42,16.85) v1(29.62,23.44) v1(29.87,14.66) v1(30.88,14.64) v1(31.09,37.58) v1(31.14,16.92) v1(31.57,36.95) v1(31.74,16.48) v1(31.73,15.64) v1(31.77,14.74) v1(32.26,37.35) v1(32.46,36.47) v1(32.84,38.87) v1(33.53,12.03) v1(33.56,8.63) v1(33.76,76.83) v1(33.78,70.48) v1(34.32,12.01) v1(34.52,8.63) v1(34.65,3.85) v1(35.1,12.02) v1(35.74,8.63) v1(36.45,54.8) v1(36.88,61.61) v1(37.59,41.01) v1(37.98,12.18) v1(38.36,42.1) v1(38.84,40.88) v1(39.04,43.78) v1(39.65,81.63) v1(39.7,78.38) v1(39.75,74.11) v1(39.75,66.79) v1(39.8,63.19) v1(39.73,53.97) v1(39.88,70.58) v1(40.03,43.81) v1(40.03,42.74) v1(40.08,41.65) v1(40.06,40.66) v1(40.46,84.68) v1(40.67,54.27) v2(22.21,21.74) v2(22.38,20.65) v2(22.72,21.29) v2(23.19,21.76) v2(23.17,20.65)
VBATT_LVL: length 4.1
  TOP w0.127: U1.26 26.91,80.24 R12.2 R7.1
VCC3_3: length 14.9
  TOP w0.508: R81.1 33.48,65.35 v1(33.53,65.4) ; v1(27.46,64.94) 27.64,65.12 R82.1 ; v1(18.03,67.17) 18.42,67.17 18.6,66.99 Q10.G ; v1(18.21,61.11) 18.26,61.15 R80.1 ; Q9.G v1(26.47,65.57) ; v1(18.6,63.24) 18.57,63.21 18.57,62.62 Q12.G ; v1(18.06,66.21) 18.42,65.85 R83.1 ; Q11.G v1(30.08,64.75)
  BOTTOM w0.508: 39.04,51.42 JP4.1 ; JP4.1 39.88,52.26 ; JP4.1 40.72,51.42 ; JP4.1 39.88,50.58 ; v1(22.33,70.02) 22.21,70.02 21.68,70.55 U6.8 ; v1(31.57,65.87) 31.83,66.12 R40.1 ; R43.1 19.36,70.3 v1(18.79,69.73)
  vias: v1(16.44,51.22) v1(17.17,51.2) v1(17.99,51.25) v1(18.8,51.25) v1(19.66,51.38) v1(19.76,52.21) v1(19.84,53.89) v1(19.81,53.03) v1(22.5,30.64) v1(22.58,29.91) v1(22.89,50.71) v1(22.91,51.5) v1(23.7,50.69) v1(23.73,51.53)
VCC3_3_I2C:
  vias: v1(37.41,32.86) v1(37.63,31.78) v1(38.15,32.41) v1(38.27,30.98)
VCC4_4: length 70.3
  TOP w0.508: v1(29.64,78.53) 29.64,81.27 29.19,81.73 R7.2
  L3-INT w0.508: v1(35.83,24.04) 33.93,25.95 33.93,36.73 31.37,39.29 31.37,39.92 31.32,39.98 31.32,61.33 28.84,63.8 28.84,77.21 28.58,77.48 28.58,78.05 29.06,78.53 v1(29.64,78.53)
  BOTTOM w0.508: R110.2 18.52,25.77 19,26.25 21.69,26.25 R109.2 R99.1 23.57,25.7 24.41,26.53 v1(24.67,26.53) ; R100.1 v1(27.43,25.85)
  vias: v1(26.29,24.86) v1(27.1,24.86) v1(27.87,25.16) v1(28.25,25.85) v1(28.5,24.65) v1(29.06,25.54) v1(29.37,24.71)
VCC_BAT: length 59.9
  L3-INT w0.508: J10.1 39.86,15.83 ; J10.1 38.97,14.94 ; J10.1 40.75,14.94 ; J10.1 39.86,14.05 ; v1(21.15,56.89) 21.15,55.23 21.97,54.4 21.97,50.62 20.12,48.76 20.12,45.56 20.68,45 20.68,39.52 19.28,38.12 19.28,31.72 18.29,30.72 v1(18.29,21.68)
  BOTTOM w0.508: R134.2 19.66,71.82 18.06,70.22 18.06,68.18 17.34,67.46 17.34,60.14 20.6,56.89 v1(21.15,56.89)
  vias: v1(18.32,20.9) v1(18.45,20.05)
VCC_MCU: length 20.4
  TOP w0.305: U1.44 22.47,71.91 22.83,71.55 v1(22.83,71.47)
  TOP w0.381: v1(30.81,72.71) 30.57,72.71 30.19,73.09 U1.14 ; v1(21.36,77.87) 21.57,77.87 22.34,77.09 U1.34 ; v1(28.2,79.14) 27.91,78.85 U1.24
  TOP w0.508: R116.1 33.37,80.98 v1(33.2,81.14) ; R4.2 v1(32.59,83.53) ; v1(26.95,67.56) 26.95,67.64 27.38,68.07 R125.2 ; R123.2 30.94,70.17 30.51,70.6 v1(30.08,70.6) ; R124.2 22,67.61 22.3,67.3 R122.2 22.89,66.74 23.09,66.54 v1(23.24,66.54) ; R37.2 16.97,79.67 v1(17.43,80.13) ; R39.2 v1(26.11,83) ; v1(18.19,73.07) 18.19,72.96 17.56,72.33 R120.1 ; R70.2 v1(20.65,80.51)
  L3-INT w0.508: JP4.2 40.72,49.42 ; JP4.2 39.88,50.26 ; JP4.2 39.88,48.58 ; JP4.2 39.04,49.42
  BOTTOM w0.508: 30.56,82.87 v1(30.56,83.66)
  vias: v1(18.45,77.45) v1(18.54,76.7) v1(32.18,70.09)
A0: length 30.1
  TOP w0.127: v1(20.65,77.05) 20.77,77.05 21.41,76.4 21.64,76.4 21.95,76.09 U1.36
  L3-INT w0.127: v1(19.43,56.94) 19.01,57.36 19.01,62.85 19.09,62.93 19.09,63.44 18.53,64 18.53,65.13 18.81,65.41 18.81,67.54 18.3,68.05 18.3,71.36 20.01,73.07 20.01,75.4 20.65,76.05 v1(20.65,77.05)
  BOTTOM w0.127: Q4.G 22.33,54.04 v1(19.43,56.94)
A1: length 33.3
  TOP w0.127: v1(21.49,75.33) 21.75,75.59 U1.37 ; v1(19.81,59.53) 22.99,56.36 Q19.G 32.33,55.95 32.45,56.06 Q17.G
  L3-INT w0.127: v1(21.49,75.33) 21.08,75.33 20.51,74.76 20.51,72.12 19.54,71.15 19.54,63.02 19.27,62.75 19.27,60.07 v1(19.81,59.53)
A2: length 12.9
  TOP w0.127: U1.38 22.04,75.09 21.59,74.64 v1(21.1,74.64)
  L3-INT w0.127: v1(22.35,80.05) 22.06,79.76 22.06,78.19 22.16,78.09 22.16,75.3 21.51,74.64 v1(21.1,74.64)
  BOTTOM w0.127: R36.1 23.37,84.27 22.35,83.25 v1(22.35,80.05)
A3: length 8.4
  TOP w0.127: R38.2 18.47,79.44 18.9,79.01 18.9,77.66 19.48,77.08 19.48,75.83 20.17,75.14 20.38,75.14 20.6,74.91 20.6,74.44 20.89,74.15 21.6,74.15 22.04,74.59 U1.39
A5: length 4.1
  TOP w0.127: Q15.S 20.89,71.8 20.53,71.43 R121.2 20.53,70.81 20.25,70.53 18.77,70.53 18.49,70.81 R34.1
A5_R: length 6.7
  TOP w0.127: U1.41 22.01,73.59 21.5,73.08 20.58,73.08 19.89,73.77 Q15.D 18.88,74.49 17.73,73.35 R120.2
BAT: length 3.8
  TOP w0.127: v1(21.19,73.57) 21.52,73.57 22.03,74.09 U1.40
  BOTTOM w0.127: v1(21.19,73.57) 21.49,73.57 21.8,73.27 R135.2 R134.1
CHARGE_STAT: length 4.4
  TOP w0.127: U1.32 23.91,78.46 24.34,78.89 24.34,79.95 24.04,80.25 R10.2 R8.1
CON_3V: length 41.4
  TOP w0.508: R121.1 19.51,71.58 Q15.G 18.89,72.84 19.02,72.96 v1(19.02,73.2) ; J2.1 C33.2 v1(17.52,83.09) ; JP2.1 13.11,50.84 ; JP2.1 12.27,51.67 ; JP2.1 11.43,50.84 ; JP2.1 12.27,50 ; v1(36.1,80.9) 35.4,80.21 R118.1 ; R1.2 v1(16.54,77.41)
  L3-INT w0.508: 15.16,81.25 J2.1 ; J2.1 15.16,82.93 ; J2.1 14.32,82.09 ; J2.1 16,82.09 ; 11.43,50.84 JP2.1 ; JP2.1 13.11,50.84 ; JP2.1 12.27,50 ; JP2.1 12.27,51.67 ; 36.73,51.43 JP1.1 ; JP1.1 38.41,51.43 ; JP1.1 37.57,52.26
  BOTTOM w0.508: Q13.G 27.25,80.25 28.45,81.45 v1(28.45,84.4) ; 36.73,51.43 JP1.1 37.57,50.59 ; v1(16.54,77.41) 16.54,77.28 19.02,74.8 v1(19.02,73.2) ; v1(31.35,85.16) Q14.G ; R119.1 24.34,83.15 25.07,83.89 v1(25.07,84.9)
  vias: v1(27.64,37.58) v1(27.64,36.85) v1(28.32,36.57) v1(28.45,37.35) v1(28.6,51.73) v1(28.63,50.97) v1(28.96,36.14) v1(29.03,36.87)
CON_5V: length 3.4
  BOTTOM w0.508: 37.57,46.59 JP1.3 36.73,47.43 ; 12.27,46 JP2.3 13.11,46.84
  vias: v1(20.81,46.45) v1(21.64,46.42) v1(32.87,40.96) v1(32.9,40.12) v1(33.63,41.24)
D2_I2C: length 57.1
  TOP w0.127: U1.19 30.06,75.59 v1(30.64,76.17)
  L3-INT w0.127: J4.3 39.62,26.41 36.41,29.62 36.41,36.36 33.38,39.4 32.62,39.4 32.02,40 32.02,62.44 30.83,63.63 30.83,71.4 31.9,72.47 31.9,75.46 31.53,75.83 30.97,75.83 v1(30.64,76.17)
D3: length 55.7
  TOP w0.127: U1.18 30.27,75.09 31.35,76.17 v1(31.35,76.55)
  L3-INT w0.127: J4.4 39.62,31.64 38.69,32.57 38.69,36.88 32.43,43.15 32.43,62.39 31.08,63.74 31.08,71.13 32.15,72.21 32.15,75.74 v1(31.35,76.55)
D4: length 27.9
  TOP w0.127: v1(28.15,79.98) 27.7,79.98 27.41,79.69 U1.25
  L3-INT w0.127: v1(28.15,79.98) 27.08,79.98 26.1,80.95 23.94,80.95 23.58,80.59 22.2,80.59 21.81,80.2 21.81,78.09 21.91,77.99 21.91,76.9 20.26,75.25 20.26,72.44 19.29,71.47 19.29,64.59 v1(19.03,64.33)
  BOTTOM w0.127: Q5.G 18.43,64.72 18.82,64.33 v1(19.03,64.33)
D5: length 47
  TOP w0.127: U1.31 24.41,78.46 24.64,78.69 24.64,79.54 v1(25.05,79.95) ; Q7.G 29.97,39.95 30.28,39.64 v1(30.69,39.64)
  L3-INT w0.127: v1(25.05,79.95) 24.64,79.54 24.64,78.98 27.3,76.33 27.3,72.93 28.4,71.82 28.4,63.62 30.88,61.14 30.88,39.83 v1(30.69,39.64)
D6: length 20.6
  TOP w0.127: SW1.2 16.52,84.34 23.37,84.34 25.22,82.49 25.22,81.44 25.95,80.71 R39.1 26.38,80.71 26.66,80.43 26.66,78.9 26.41,78.65 U1.27
D8: length 59.8
  TOP w0.127: v1(26.13,79.14) 26.13,78.77 25.91,78.55 U1.28
  L3-INT w0.127: v1(26.13,79.14) 25.56,79.71 25.56,80.14 25.25,80.45 24.28,80.45 23.31,79.47 23.31,78.09 22.74,77.52 22.74,73.62 20.09,70.98 20.09,64.16 20.56,63.69 20.56,56.09 15.94,51.46 15.94,48.21 19.6,44.55 19.6,39.96 19.11,39.48 18.64,39.48 12.7,33.53 J7.4
D9: length 59.6
  TOP w0.127: v1(26.16,80) 25.63,79.47 25.63,78.81 25.41,78.59 U1.29
  L3-INT w0.127: v1(26.16,80) 25.46,80.7 24.17,80.7 23.05,79.58 23.05,78.19 22.48,77.62 22.48,73.73 19.84,71.08 19.84,62.49 19.52,62.17 19.52,61.76 20.31,60.97 20.31,56.19 15.69,51.57 15.69,48.1 19.34,44.45 19.34,40.07 19,39.73 18.33,39.73 13.56,34.96 J7.3
D10: length 52.3
  TOP w0.127: v1(25.14,79.19) 25.14,78.86 24.91,78.63 U1.30
  L3-INT w0.127: J6.4 37.65,38.96 32.94,43.67 32.94,62.99 32.65,63.28 32.65,67.53 31.66,68.52 31.66,71.35 32.41,72.1 32.41,76.49 29.88,79.02 28.9,79.02 28.42,78.54 25.78,78.54 v1(25.14,79.19)
D11: length 40
  TOP w0.127: U1.12 29.95,72.09 31.68,70.36 31.68,67.78 v1(32.16,67.3)
  L3-INT w0.127: J6.3 39.02,37.56 38.48,37.56 32.69,43.35 32.69,62.86 32.16,63.39 v1(32.16,67.3)
EN1: length 3.8
  BOTTOM w0.127: R109.1 R111.2 21.16,24.25 21.52,23.89 21.9,23.89 22.33,23.46 U11.6
EN2: length 4.5
  BOTTOM w0.127: R110.1 R112.2 19.74,24.3 20.75,23.28 21.57,23.28 21.83,23.02 U11.5
GPIO_RY: length 4.5
  TOP w0.127: R37.1 R38.1 18.24,78.17 17.95,77.88 17.95,76.13 18.27,75.81 Q8.G
GPIO_RY_MCU: length 70.7
  TOP w0.127: v1(20.48,78.91) 19.71,79.67 R70.1 Q8.D
  L3-INT w0.127: v1(20.48,78.91) 20.48,78.88 19.5,77.91 19.5,76.52 19.51,76.5 19.51,72.94 18.04,71.47 18.04,67.86 18.56,67.35 18.56,65.52 18.1,65.07 18.1,63.02 18.71,62.41 18.71,54.95 15.43,51.67 15.43,48 18.74,44.69 18.74,42.82 16.24,40.32 12.23,40.32 11.42,39.51 11.42,31.91 13.55,29.78 13.55,22.81 J8.4
INT_5V: length 3.4
  TOP w0.508: 39.04,47.42 JP4.3 ; JP4.3 39.88,48.26 ; JP4.3 40.72,47.42 ; JP4.3 39.88,46.58
  vias: v1(34.95,46.22) v1(35.74,46.35) v1(35.9,18.24) v1(36.53,46.3) v1(36.58,18.61) v1(36.52,17.65)
LX: length 3.3
  TOP w0.508: 31.57,20.64 32.74,20.64 33.61,19.78 v1(34.52,19.78)
  vias: v1(35.56,25.7) v1(35.89,27.4) v1(36.07,28.13) v1(36.38,26.61) v1(36.39,25.8) v1(36.46,25.01)
MISO: length 10.5
  TOP w0.127: U1.11 28.41,70.71 29.5,69.61 29.87,69.61 30.43,69.05 30.43,68.77 R123.1 30.6,68.27 28.98,66.65 Q11.D 28.98,64.02 28.6,63.64 R75.1
MISO_MOS: length 5.6
  TOP w0.127: Q11.S 31.69,66.75 32.08,66.36 32.81,66.36 33.06,66.62 33.06,68.62 v1(32.55,69.13)
  BOTTOM w0.127: v1(32.55,69.13) 32.4,69.28 R42.1
MOSI: length 27.4
  TOP w0.127: v1(29.87,68.72) 29.75,68.72 27.91,70.56 U1.10 ; v1(28.73,59.45) 28.81,59.53 R77.2 30.15,63.47 v1(29.92,63.69) ; v1(23.19,65.73) R122.1 22.3,65.22 21.67,64.59 Q12.D
  L3-INT w0.127: v1(29.92,63.69) 29.58,64.04 29.58,68.43 v1(29.87,68.72) ; v1(28.73,59.45) 27.95,59.45 27,60.4 27,61.54 23.19,65.35 v1(23.19,65.73)
MOSI_MOS: length 7.9
  TOP w0.127: Q12.S 20.89,61.52 20.53,61.15 R80.2 v1(20.02,61.97)
  BOTTOM w0.127: R45.2 18.71,66.29 19.51,65.5 19.51,64.61 20.03,64.09 20.03,61.98 v1(20.02,61.97)
RESET: length 35.2
  TOP w0.127: U1.13 30.14,72.59 32,70.73 v1(32.69,70.73) ; R88.2 C38.2 R4.1 32.59,81.02 v1(32.44,80.86)
  L3-INT w0.127: v1(32.44,80.86) 31.99,80.42 31.99,77.49 32.66,76.82 32.66,70.76 v1(32.69,70.73)
  BOTTOM w0.127: J11.5 24.69,62.58 26.29,62.58 29.09,65.37 31.78,65.37 33.22,66.82 33.22,70.2 v1(32.69,70.73)
RESET#: length 3.9
  TOP w0.127: R1.1 C6.2 16.45,75.38 J2.5
RXI: length 24.6
  TOP w0.127: R118.2 34.79,78.46 v1(34.75,78.43)
  BOTTOM w0.127: J2.2 15.84,79.4 20.68,79.4 22.32,77.77 28.5,77.77 29.02,77.24 30.66,77.24 31.19,77.78 31.19,78.86 32.58,80.24 Q14.S 33.35,79.59 34.51,78.43 v1(34.75,78.43)
RXI_R: length 7.5
  TOP w0.127: U1.20 29.8,76.09 30.99,77.28 31.7,77.28 32.59,78.17 32.59,78.63 33.15,79.18 R116.2 v1(33.37,78.44)
  BOTTOM w0.127: v1(33.37,78.44) 32.88,77.95 Q14.D
SCK: length 20.5
  TOP w0.127: U1.9 27.41,70.47 28.29,69.6 28.29,65 26.93,63.64 R76.1 25.65,63.64 v1(25.24,64.05) ; Q10.D 21.29,69.28 21.34,69.23 R124.1 22.38,69.23 22.71,68.9 v1(22.71,68.72)
  BOTTOM w0.127: v1(25.24,64.05) 23.68,64.05 22.2,65.52 22.2,68.22 v1(22.71,68.72)
SCK_MOS: length 5.6
  TOP w0.127: v1(18.79,68.72) 19.7,67.82 19.7,66.55 R83.2 20.4,66.11 20.89,66.6 Q10.S
  BOTTOM w0.127: v1(18.79,68.72) 18.72,68.65 R44.2
SPI1_WP#: length 3.4
  BOTTOM w0.508: U6.3 30.81,68.01 30.81,66.59
SS: length 9.7
  TOP w0.127: R19.1 22.97,64.71 23.21,64.95 23.82,64.95 24.18,65.32 Q9.D 24.77,65.73 25.53,66.49 25.53,66.92 26.7,68.09 26.7,68.88 27.1,69.28 R125.1 27.38,69.94 26.91,70.42 U1.8
SS_MOS: length 6.9
  TOP w0.127: v1(27.79,67.5) 27.64,67.35 R82.2 Q9.S
  BOTTOM w0.127: R41.1 27.16,71.19 27.79,70.55 v1(27.79,67.5)
TXO: length 7.4
  TOP w0.127: v1(30.46,77.74) 30.46,77.25 29.8,76.59 U1.21
  BOTTOM w0.127: R117.2 29.55,82.87 Q13.D 29.55,80.1 30.46,79.19 v1(30.46,77.74)
TXO_R: length 17.5
  BOTTOM w0.127: J2.3 14.31,78.94 14.31,80.44 14.81,80.94 18.62,80.94 19.59,79.98 21.16,79.98 21.58,79.56 23.43,79.56 25.3,81.42 25.35,81.42 R119.2 Q13.S
USB_5V: length 5
  TOP w0.508: 12.4,16.75 JP3.3 11.56,15.91
  BOTTOM w0.508: 11.56,15.91 JP3.3 ; JP3.3 12.4,16.75 ; JP3.3 12.4,15.07 ; JP3.3 13.24,15.91
  vias: v1(12.15,17.49) v1(12.89,17.47) v1(14.35,10.71) v1(14.69,10.06) v1(15.34,10.76) v1(30.2,10.13) v1(30.97,10.13) v1(31.65,13.53) v1(31.65,12.74) v1(31.68,11.93) v1(31.7,11.12) v1(31.78,10.2)
USB_D+: length 70
  TOP w0.102: R72.2 35.4,6.12 L3.3 36,6.35 36.3,6.65 36.76,6.65 37.34,7.23 37.34,10.94 v1(37.7,11.29) ; R73.1 24.34,68.24 24.23,68.14 24.23,67.73 v1(24.56,67.4)
  L3-INT w0.102: v1(24.56,67.4) 24.23,67.07 24.23,66.54 30,60.78 30,40.19 29.81,40 29.81,39.28 30.51,38.58 30.51,37.2 32.49,35.22 32.49,25.29 37.38,20.4 37.38,20.28 37.38,20.28 37.38,11.61 v1(37.7,11.29)
USB_D-: length 70
  TOP w0.102: v1(23.65,67.4) 23.98,67.73 23.98,68.14 23.88,68.24 R74.1 ; v1(36.78,11.29) 37.09,10.99 37.09,10.07 36.93,9.92 36.93,9.62 37.09,9.47 37.09,9.16 36.93,9.01 36.93,8.7 37.09,8.55 37.09,8.25 36.93,8.09 36.93,7.79 37.09,7.64 37.09,7.33 36.65,6.9 36.27,6.9 35.98,7.2 L3.2 35.4,7.42 R71.2
  L3-INT w0.102: v1(23.65,67.4) 23.95,67.1 23.95,66.43 29.72,60.66 29.72,40.31 29.53,40.12 29.53,39.16 30.23,38.46 30.23,37.09 32.21,35.1 32.21,25.17 37.1,20.28 37.1,20.17 37.1,11.61 v1(36.78,11.29)
USB_L_D+: length 7.1
  TOP w0.102: J1.3 31.46,4.78 31.19,5.05 31.15,5.05 31.06,5.14 31.06,5.35 30.46,5.96 30.46,6.64 30.6,6.78 30.73,6.78 30.77,6.74 D8.2 31.81,6.74 31.91,6.64 32.27,6.64 32.75,6.16 32.95,6.16 33.34,6.54 33.63,6.54 L3.4 33.82,6.24 R72.1
USB_L_D-: length 7.1
  TOP w0.102: J1.2 30.81,5.25 30.2,5.85 30.2,6.75 30.53,7.08 30.7,7.08 30.77,7.14 D8.1 31.45,7.14 31.75,7.45 32.9,7.45 33.15,7.2 L3.1 34,7.37 R71.1
USB_R_D+: length 2.6
  TOP w0.102: U1.4 24.91,70.62 24.79,70.5 24.79,70.26 24.34,69.82 24.29,69.76 24.16,69.63 24.16,69.43 24.34,69.26 R73.2
USB_R_D-: length 2.5
  TOP w0.102: U1.3 24.41,70.58 24.53,70.46 24.53,70.37 24.16,70 24.11,69.94 23.9,69.74 23.9,69.41 23.75,69.26 R74.2
XTAL1: length 2.6
  TOP w0.127: U1.17 29.88,74.59 30,74.47 30.48,74.47 v1(30.8,74.79)
  BOTTOM w0.127: R52.2 31.12,74.46 v1(30.8,74.79)
XTAL2: length 2.7
  TOP w0.127: U1.16 29.83,74.09 29.95,74.21 30.48,74.21 v1(30.8,73.89)
  BOTTOM w0.127: R51.2 31.43,73.27 v1(30.8,73.89)
N15412895: length 4.8
  TOP w0.508: C3.1 22.94,8.89 R2.2 23.42,9.82 R3.1 23.37,10.48 22.81,11.04 Q1.4
N15421610: length 3.7
  TOP w0.127: v1(34.81,73.54) X1.1
  BOTTOM w0.127: R51.1 C11.2 34.55,73.27 v1(34.81,73.54)
N15479014: length 1.5
  TOP w0.127: D3.A 24.33,63.44 23.98,63.79 R19.2
N15479046: length 1.7
  TOP w0.127: D2.A 31.54,78.56 30.62,79.48 R18.2
N15479600: length 2
  TOP w0.127: U1.22 29.66,77.09 29.95,77.38 29.95,78.04 R18.1
N15488481: length 1.7
  BOTTOM w0.508: 37.57,48.59 JP1.2 36.73,49.43
N15488587: length 22.1
  L3-INT w0.508: v1(18.75,38.88) 19.14,38.88 20.04,39.78 20.04,44.74 19.48,45.3 19.48,49.27 v1(21.29,51.07)
  BOTTOM w0.127: R22.1 19.28,39.28 19.19,39.37 18.28,39.37 18.19,39.28 R20.2 17.91,39.18 18.21,38.88 v1(18.75,38.88)
  BOTTOM w0.508: Q4.D 25.22,51.24 23.99,50 22.35,50 v1(21.29,51.07)
N15488669: length 4.2
  BOTTOM w0.508: R22.2 21.62,38.22 C13.1 21.62,36.8 21.41,36.59 21.41,35.58
N15503313: length 4.8
  TOP w0.508: R21.1 26.62,51.4 v1(26.01,50.79)
  BOTTOM w0.508: 12.27,48.84 12.27,49.67 ; 12.27,48.84 11.43,48.84 ; 12.27,48.84 13.11,48.84 ; 12.27,48.84 12.27,48
N15503395: length 16.5
  TOP w0.127: R23.1 R21.2 23.83,53.03 22.46,54.4 21.4,54.4 20.35,55.45 20.35,58.11 v1(19.69,58.77)
  BOTTOM w0.127: v1(19.69,58.77) 19.32,59.13 19.32,59.73 19.43,59.85 Q5.D
N15503453: length 5.3
  TOP w0.508: R23.2 v1(27.89,50.87)
  BOTTOM w0.508: v1(27.89,50.87) 27.89,50.52 28.35,50.06 C16.1 28.35,48.48 28.02,48.15 Q3.4
N15616877: length 1.7
  TOP w0.508: U8.4 34.91,18.74 35.41,19.24 R28.1
N15678706: length 3.7
  TOP w0.508: R30.2 23.37,31.31 22.99,31.69 R31.1 22.18,32.07 21.67,31.56 U5.4
N15678710: length 1.8
  TOP w0.508: R29.1 17.48,29.66 17.86,30.04 U5.1
N15949416: length 2.7
  BOTTOM w0.127: D5.A 25.16,86.18 24.26,85.28 R36.2
N15953991: length 3.1
  TOP w0.508: R49.1 26.87,39.28 R48.2 26.95,38.44 Q7.D
N15954045: length 14.9
  TOP w0.508: Q6.4 31.06,31.5 31.57,32.02 31.57,35.98 30.05,37.5 30.05,38.77 28.92,39.9 27.37,39.9 27.31,39.95 27.15,39.95 26.88,40.22 R49.2 26.75,40.43 C30.1
N15970604: length 5.9
  TOP w0.127: R88.1 SW2.3 SW2.4
N16069358: length 5.4
  TOP w0.127: X1.3 32.51,75.03 32.93,74.62 v1(34.75,74.62)
  BOTTOM w0.127: v1(34.75,74.62) 34.6,74.46 C12.2 R52.1
N16332828: length 1.7
  BOTTOM w0.127: R41.2 28.55,71.44 28.87,71.12 U6.1
N16332840: length 1.9
  BOTTOM w0.127: U6.2 30.81,69.28
N16332886: length 1.6
  BOTTOM w0.127: U6.6 R44.1
N16332890: length 1.6
  BOTTOM w0.127: R45.1 U6.5
N16332894: length 1.6
  BOTTOM w0.508: R43.2 U6.7
N16392209: length 2.5
  TOP w0.508: 19.32,4.24 J9.1 ; J9.1 20.16,5.08 ; J9.1 20.16,3.4
N16520017: length 7.8
  TOP w0.127: C9.2 17.48,69.79 17.91,70.22 20.96,70.22 21.61,70.88 21.61,72.84 21.87,73.09 U1.42
N16521339: length 1.9
  TOP w0.127: U1.6 25.91,69.87 26.11,69.66 C10.2
N17224486: length 2.5
  BOTTOM w0.127: U11.14 22.83,19.01 21.67,17.85 R104.1
N17229179: length 2.3
  BOTTOM w0.127: U11.12 24.44,20.4 25.73,19.12 R106.1
N17232070: length 4.4
  BOTTOM w0.127: U11.16 21.83,19.3 21.22,18.68 20.49,18.68 20.06,18.25 19.19,18.25 18.98,18.04 R107.1
N17245016: length 3.3
  BOTTOM w0.127: R102.1 20.4,17.97 20.67,18.25 21.43,18.25 22.33,19.15 U11.15
N17250507: length 2.7
  BOTTOM w0.127: U11.4 20.66,21.9 20.37,22.19 20.37,22.75 19.81,23.31 R103.2
N17255097: length 2.5
  BOTTOM w0.127: U11.1 20.73,20.4 20.49,20.16 20.49,19.64 19.94,19.09 RT1.2
N17284429: length 2.2
  BOTTOM w0.127: U11.7 22.83,23.56 23.57,24.3 R99.2
N17293450: length 4.6
  BOTTOM w0.127: U11.9 24.44,22.26 24.44,22.8 24.62,22.98 24.62,23.99 25.61,24.98 R100.2
N17391070: length 2
  TOP w0.127: R75.2 28.07,61.69 27.92,61.54 J11.1
N17391701: length 2.1
  TOP w0.127: J11.3 25.38,61.6 25.94,62.16 R76.2
N17393508: length 6.1
  TOP w0.127: J11.4 26.55,57.01 28.37,57.01 28.98,57.62 29.72,57.62 30.15,58.06 R77.1
N17696371: length 3.4
  L3-INT w0.508: 12.7,36.12 J7.2 ; J7.2 11.86,36.96 ; J7.2 12.7,37.8 ; J7.2 13.54,36.96
  vias: v1(18.83,41.01) v1(18.85,40.28)
N17706028: length 3.4
  BOTTOM w0.508: 39.62,34.12 J6.2 ; J6.2 40.46,34.96 ; J6.2 38.78,34.96 ; J6.2 39.62,35.8
N17729529: length 3.4
  BOTTOM w0.508: 39.62,23.12 J4.2 ; J4.2 40.46,23.96 ; J4.2 38.78,23.96 ; J4.2 39.62,24.8
N17744633: length 3.4
  TOP w0.508: JP3.2 13.24,13.91 ; JP3.2 11.56,13.91 ; JP3.2 12.4,13.07 ; JP3.2 12.4,14.75
N17744655: length 3.4
  TOP w0.508: 11.86,25.96 J8.2 ; J8.2 12.7,26.8 ; J8.2 13.54,25.96 ; J8.2 12.7,25.12
N18131103: length 2.7
  TOP w0.508: Q17.D R128.2 R129.1
N18131122: length 4
  TOP w0.508: Q16.4 29.2,49.5 C46.1 R129.2
N18141519: length 2.5
  TOP w0.508: Q19.D R132.2 R133.1
N18141550: length 3.2
  TOP w0.508: R133.2 C49.1 20.59,49.86 20.31,49.58 Q18.4
N18306152: length 6.2
  TOP w0.127: J2.9 16.21,67.14 16.21,70.26 17.01,71.06 R34.2

## Copper pours and planes (outline as drawn; the poured copper is in the pictures)
+V5A on TOP (solid shape): outline of 118 points within 16.25,12.92 24.55,20.34
+V5A on BOTTOM (solid shape): 23.6,19.96 23.6,19.83 24.84,18.58 25.25,18.58 25.53,18.3 25.53,17.56 25.48,17.56 25.11,17.32 25.14,16.88 25.16,16.85 21.21,12.89 16.41,12.89 16.27,13.04 16.27,14.97 16.26,14.98 16.26,16.21 16.32,16.27 17.49,16.27 18.65,15.12 19.7,15.12 20.02,14.98 20.34,15.12 20.97,15.12 21.32,15.01 21.63,15.2 22.31,15.88 22.31,18.03 23.12,18.84 23.12,20.08 23.21,20.18 23.38,20.18
+V5A on L3-INT (solid shape): outline of 2411 points within 18.83,12.93 30.6,79.59
GND on TOP (solid shape): 34.17,39.26 34.17,36.14 33.86,35.83 32.34,35.83 30.81,37.35 30.81,39.06 31.04,39.28 32.82,39.28 32.92,39.39 34.04,39.39
GND on TOP (solid shape): 17.31,27.97 17.31,26.47 17.25,26.41 15.27,26.41 14.38,27.3 13.49,27.3 13.49,28.75 11.89,28.75 11.89,29.02 12.12,29.25 16.03,29.25
GND on TOP (solid shape): 35.94,12.13 35.94,9.82 36.12,9.64 36.12,9.28 36.16,9.25 36.15,9.22 36.13,9.11 36.12,9.01 36.12,8.7 36.14,8.55 36.18,8.4 36.15,8.31 36.13,8.2 36.1,8.17 35.84,8.17 35.52,8.29 35.19,8.27 33.28,8.27 32.74,7.74 31.76,7.74 31.68,7.8 31.59,7.86 31.4,7.93 31.2,7.96 30.43,7.96 30.37,7.89 30.2,7.89 30.04,7.74 29.72,7.74 29.54,7.92 29.54,8.9 29.94,9.3 31.72,9.3 32.31,9.89 32.31,9.97 32.36,10.02 32.36,12.13 32.82,12.59 35.49,12.59
GND on TOP (solid shape): 16.66,23.31 17.66,23.31 17.99,22.98 17.99,22.57 17.99,21.99 17.86,21.67 18,21.36 18,21.19 17.88,20.87 18.03,20.57 18.12,20.48 18.15,20.41 18.13,20.34 18.05,19.89 18.42,19.62 18.45,19.6 18.47,19.57 18.47,18.25 18.34,18.13 18.34,16.12 18.18,15.96 16.62,15.96 16.51,16.07 16.51,16.6 16.13,16.98 16.13,20.11 15.22,21.02 15.22,23.33 15.72,23.84 16.13,23.84
GND on TOP (solid shape): 16.07,87.51 17.85,87.51 17.85,88.98 31.28,88.98 31.75,88.51 31.75,87.27 31.09,86.6 20.88,86.6 19.08,84.8 18.77,84.8 18.67,84.88 18.72,84.99 18.21,86.94 17.7,84.99 17.75,84.88 17.65,84.8 17.43,84.8 15.45,86.78 15.45,88.59 15.84,88.98 16.07,88.98
GND on TOP (solid shape): 32.21,16.69 32.21,14.43 32.04,14.26 28.52,14.26 28.38,14.12 28.29,14.1 28.21,14.17 24.7,15.14 25.45,11.57 25.52,11.5 25.49,11.41 25.12,11.04 23.83,11.04 23.32,11.55 23.32,12.34 22.99,12.67 22.66,12.67 22.46,12.46 22.15,12.46 21.9,12.72 21.9,12.99 24.06,15.15 24.14,15.15 26.29,17.3 31.6,17.3
GND on TOP (solid shape): 20.79,38.92 22.18,38.92 22.86,38.23 23.68,38.23 24.97,36.94 24.97,36.29 25.53,35.73 25.55,35.64 25.49,35.56 24.49,32.21 27.98,32.43 28.1,32.47 28.17,32.38 28.17,30.88 28.43,30.62 28.43,27.88 28.04,27.5 24.87,27.5 24.16,26.79 24.16,26.25 24.36,26.05 24.46,26.05 24.84,26.05 25.05,25.85 25.05,24.86 24.62,24.43 22.89,24.43 22.2,25.11 20.83,25.11 20.68,24.96 20.68,24.96 20.62,24.9 20.55,24.9 20.55,24.88 20.37,24.88 20.17,25.09 20.17,27.17 20.48,27.47 21.57,27.47 21.72,27.63 22.18,27.63 22.28,27.52 23.65,27.52 24.44,28.31 24.44,31.06 23.7,31.79 23.7,32.17 23.4,32.48 23.4,32.48 23.24,32.63 16.64,32.63 16.08,33.19 16.08,36.36 18.11,38.4 18.98,38.4 19.21,38.62 19.21,39.18 19.33,39.31 20.4,39.31
GND on TOP (solid shape): outline of 190 points within 27.2,1.02 35.32,5.16
GND on BOTTOM (solid shape): 18.52,23.77 18.52,23 17.53,22.01 17.53,20.09 17.97,19.65 18.28,19.65 18.32,19.63 18.37,19.62 18.53,19.46 18.53,19.09 18.54,19.08 18.54,18.14 17.6,17.2 16.22,17.2 14.96,18.45 14.96,23.03 15.95,24.02 18.27,24.02
GND on BOTTOM (solid shape): 15.57,28.41 15.62,28.41 15.67,28.36 17.45,28.36 17.6,28.21 17.6,26.79 17.53,26.71 12.95,26.71 12.9,26.73 12.82,26.74 12.74,26.75 12.66,26.75 12.58,26.74 12.5,26.73 12.45,26.71 11.81,26.71 11.48,27.04 11.48,27.18 13.49,27.18 13.49,28.75 11.91,28.75 11.91,27.18 11.48,27.18 11.48,28.69 11.86,29.07 14.91,29.07
GND on BOTTOM (solid shape): outline of 128 points within 16.98,10.03 31.64,24.11
GND on BOTTOM (solid shape): outline of 489 points within 23.05,30.99 41,45.71
GND on BOTTOM (solid shape): outline of 603 points within 14.57,1.06 41.1,13.83
GND on BOTTOM (solid shape): outline of 1713 points within 11.36,51.98 41.05,88.89
GND on L2-GND1 (solid shape): outline of 127 points within 11.18,1.02 41.14,88.98
GND on L3-INT (solid shape): 16.3,56.79 16.39,56.69 16.39,55.41 14.48,53.51 11.84,53.51 11.25,54.09 11.25,54.86 11.31,54.95 11.41,54.94 14.26,54.61 16.19,56.72
